# Altium PCB pcb_spider.PcbDoc
Units mil, origin at the board's own origin, x right, y up, seen from the top; angles counter-clockwise.
Board outline 6370 x 4735 mil, 2 copper layers (Top Layer, Bottom Layer); 6 components, 21 nets, 142 pads, 8 vias.
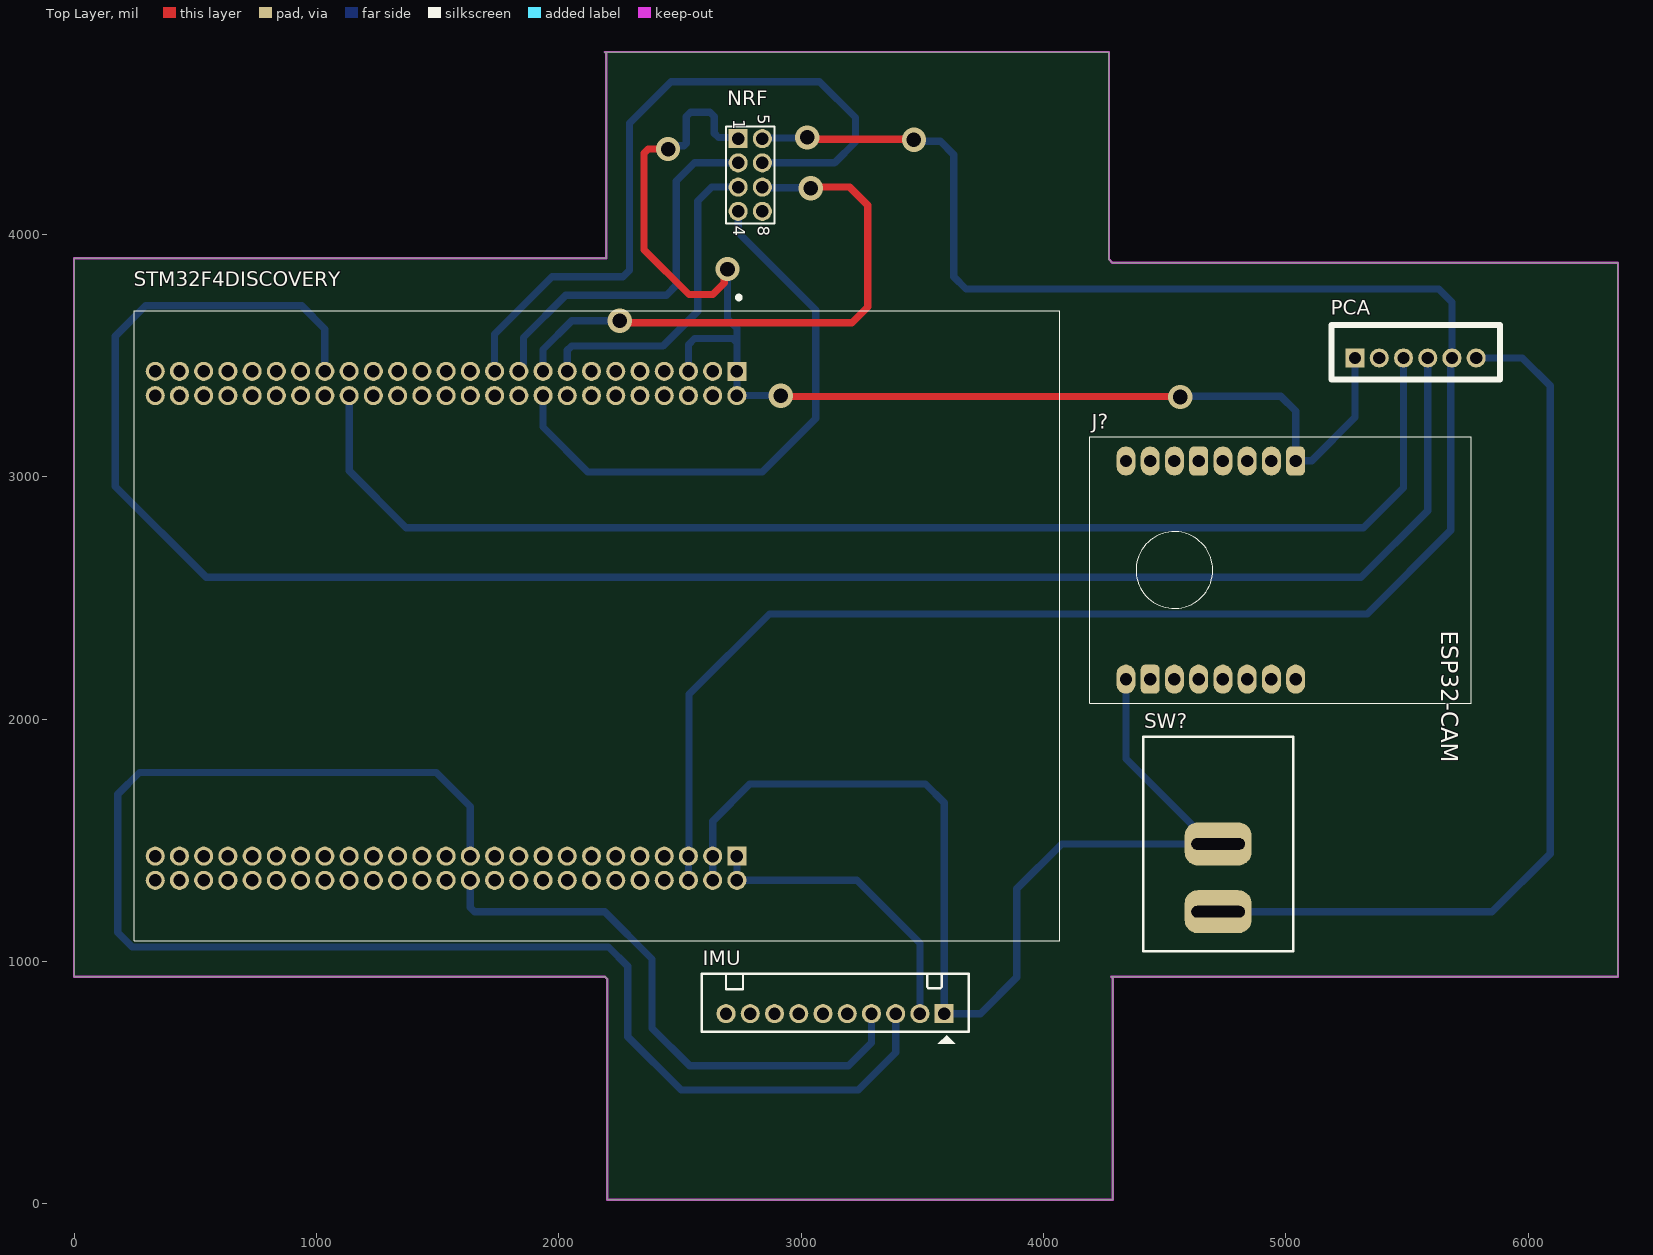
[diagram p0: Top Layer view]
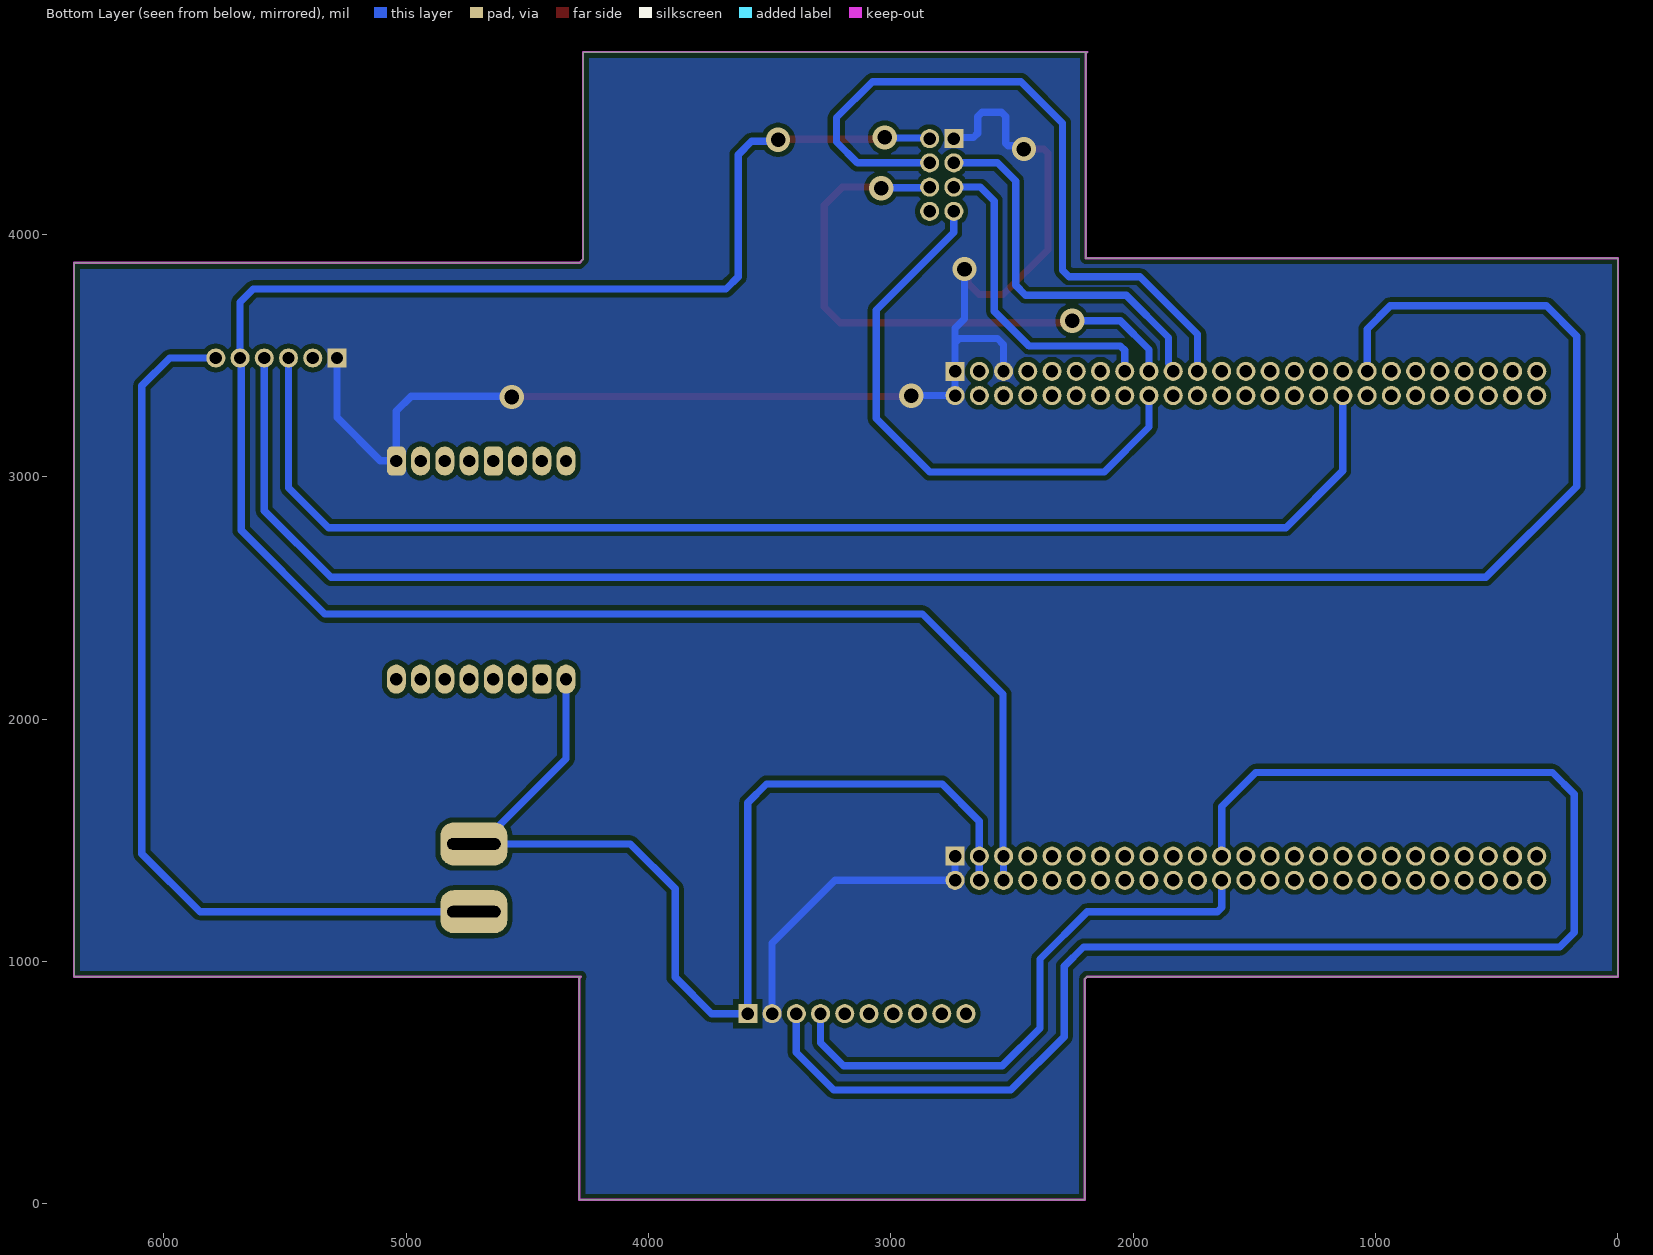
[diagram p1: Bottom Layer view, seen from below]

## Layer stack, top to bottom
Top Solder: solder mask 0.4, Solder Resist, Dk 3.5
Top Layer: signal copper 1.4
Dielectric 1: dielectric 12.6, FR-4, Dk 4.8
Bottom Layer: signal copper 1.4
Bottom Solder: solder mask 0.4, Solder Resist, Dk 3.5

## Board outline
6370,937.4 4280,937.4 4285,932.4 4285,17.4 2200,17.4 2200,927.4 2190,937.4 0,937.4 0,3902.4 2195,3902.4 2195,4747.4 2190,4752.4 4270,4752.4 4270,3897.4 4285,3882.4 6370,3882.4

## Design rules (kind name [scope] priority, off if disabled: settings)
Clearance [All] p1: gap=20 ignorepadtopadclearanceinfootprint=FALSE
PolygonConnect PolygonConnect_1 [All vs IsNamedPolygon('GND_L02_P000')] p1: connectstyle=Direct reliefconductorwidth=10 reliefentries=4 polygonreliefangle="90 Angle" airgapwidth=10
PolygonConnect [All] p2: connectstyle=Relief reliefconductorwidth=10 reliefentries=4 polygonreliefangle="90 Angle" airgapwidth=10
RoomDefinition schel [InComponentClass('schel')] p1: confinementstyle=ConfineIn formatcopy=TRUE lockcomponents=FALSE outline -1000,-247.6 1000,-247.6 1000,752.4 -1000,752.4
RoutingVias [All] p1: holewidth=28 width=50 viastyle="Through Hole" minholewidth=28 minwidth=50 maxholewidth=28 maxwidth=50
SolderMaskExpansion [All] p1: expansion=4 istentingtop=FALSE
Width [All] p1: maxlimit=50 minlimit=20 preferedwidth=30
30 further rules are at their usual default settings.

## Components (designator, comment, footprint, x,y, rotation, side; value= is the part's Value field where it differs from the comment)
IMU "" "Header 10P DC 2.54" 3590,785 r90 top
J? "ESP32-CAM" ESP32-CAM 4740,2615 r270 top
NRF "" HDR2X4_CEN 2740,4395 r270 top
PCA "" XH2.54M-6 5285,3490 r0 top
STM32F4DISCOVERY "" MODULE_STM32F4DISCOVERY 2157.05,2385 r270 top
SW? "ROCKET SWITCH-10A" SW_2ARS_TH 4721,1207.47 r180 top

## Footprints (in the part's own frame and the unit in brackets; to place one, negate y for a bottom-side part, rotate by r counter-clockwise, add the part's x,y. Pads: shape width x height; smd on the part's side, far side on the other; paste and mask are expansions set on the pad)
ESP32-CAM [mil]
  rrect50% 120x78 hole 51.18: P$1(-450,300) P$5(-450,-100) P$10(450,-300)
  oval 120x78 hole 51.18: P$2(-450,200) P$3(-450,100) P$4(-450,0) P$6(-450,-200) P$7(-450,-300) P$8(-450,-400) P$9(450,-400) P$11(450,-200) P$12(450,-100) P$13(450,0) P$14(450,100) P$15(450,200) P$16(450,300)
  silkscreen extent -550,-550 550,1025
HDR2X4_CEN [mm] "Connector; Header; 4x2 Position"
  rect 2x2 hole 1.3: 1(0,0)
  round 2 hole 1.3: 2(2.54,0) 3(5.08,0) 4(7.62,0) 5(0,2.54) 6(2.54,2.54) 7(5.08,2.54) 8(7.62,2.54)
  silkscreen extent -1.27,-1.27 8.89,3.81
"Header 10P DC 2.54" [mm]
  rect 2x2 hole 1.3: 1(0,0)
  round 2 hole 1.3: 2(0,2.54) 3(0,5.08) 4(0,7.62) 5(0,10.16) 6(0,12.7) 7(0,15.24) 8(0,17.78) 9(0,20.32) 10(0,22.86)
  silkscreen extent -3.16,-2.57 4.19,25.43
MODULE_STM32F4DISCOVERY [mm]
  rect 2x2 hole 1.3: P1_1(-26.67,14.68) P2_1(24.13,14.68)
  round 2 hole 1.3: P1_2(-24.13,14.68) P1_3(-26.67,12.14) P1_4(-24.13,12.14) P1_5(-26.67,9.6) P1_6(-24.13,9.6) P1_7(-26.67,7.06) P1_8(-24.13,7.06) P1_9(-26.67,4.52) P1_10(-24.13,4.52) P1_11(-26.67,1.98) P1_12(-24.13,1.98) P1_13(-26.67,-0.56) P1_14(-24.13,-0.56) P1_15(-26.67,-3.1) P1_16(-24.13,-3.1) P1_17(-26.67,-5.64) P1_18(-24.13,-5.64) P1_19(-26.67,-8.18) P1_20(-24.13,-8.18) P1_21(-26.67,-10.72) P1_22(-24.13,-10.72) P1_23(-26.67,-13.26) P1_24(-24.13,-13.26) P1_25(-26.67,-15.8) P1_26(-24.13,-15.8) P1_27(-26.67,-18.34) P1_28(-24.13,-18.34) P1_29(-26.67,-20.88) P1_30(-24.13,-20.88) P1_31(-26.67,-23.42) P1_32(-24.13,-23.42) P1_33(-26.67,-25.96) P1_34(-24.13,-25.96) P1_35(-26.67,-28.5) P1_36(-24.13,-28.5) P1_37(-26.67,-31.04) P1_38(-24.13,-31.04) P1_39(-26.67,-33.58) P1_40(-24.13,-33.58) P1_41(-26.67,-36.12) P1_42(-24.13,-36.12) P1_43(-26.67,-38.66) P1_44(-24.13,-38.66) P1_45(-26.67,-41.2) P1_46(-24.13,-41.2) P1_47(-26.67,-43.74) P1_48(-24.13,-43.74) P1_49(-26.67,-46.28) P1_50(-24.13,-46.28) P2_2(26.67,14.68) P2_3(24.13,12.14) P2_4(26.67,12.14) P2_5(24.13,9.6) P2_6(26.67,9.6) P2_7(24.13,7.06) P2_8(26.67,7.06) P2_9(24.13,4.52) P2_10(26.67,4.52) P2_11(24.13,1.98) P2_12(26.67,1.98) P2_13(24.13,-0.56) P2_14(26.67,-0.56) P2_15(24.13,-3.1) P2_16(26.67,-3.1) P2_17(24.13,-5.64) P2_18(26.67,-5.64) P2_19(24.13,-8.18) P2_20(26.67,-8.18) P2_21(24.13,-10.72) P2_22(26.67,-10.72) P2_23(24.13,-13.26) P2_24(26.67,-13.26) P2_25(24.13,-15.8) P2_26(26.67,-15.8) P2_27(24.13,-18.34) P2_28(26.67,-18.34) P2_29(24.13,-20.88) P2_30(26.67,-20.88) P2_31(24.13,-23.42) P2_32(26.67,-23.42) P2_33(24.13,-25.96) P2_34(26.67,-25.96) P2_35(24.13,-28.5) P2_36(26.67,-28.5) P2_37(24.13,-31.04) P2_38(26.67,-31.04) P2_39(24.13,-33.58) P2_40(26.67,-33.58) P2_41(24.13,-36.12) P2_42(26.67,-36.12) P2_43(24.13,-38.66) P2_44(26.67,-38.66) P2_45(24.13,-41.2) P2_46(26.67,-41.2) P2_47(24.13,-43.74) P2_48(26.67,-43.74) P2_49(24.13,-46.28) P2_50(26.67,-46.28)
  silkscreen extent -34.61,-48.5 33,48.5
SW_2ARS_TH [mm] "CASE: TH"
  rrect60% 7x4.5 hole 1.2 slot 5.6 at 0 deg mask+0.076: 1(0.025,0.051) 2(0.025,-7.049)
  silkscreen extent -7.87,-18.29 7.87,4.19, body extent -7.47,-17.9 7.53,3.8, height 17.81
XH2.54M-6 [mm]
  rect 2x2 hole 1.3: 1(0,0)
  round 2 hole 1.3: 2(2.54,0) 3(5.08,0) 4(7.62,0) 5(10.16,0) 6(12.7,0)
  silkscreen extent -2.48,-2.26 15.18,3.46, body extent -2.48,-2.26 15.18,3.48, height 6.91

## Part data
IMU: library part "Header 10P 2.54 Duc Cong", "Cắm", Chung_Loai=Cắm, Don_Vi=Con, Ma_Hang=MH007094, Ten_Linh_Kien="Header 10P XH2.54-10P Đực Cong"
J?: "ESP32 ESP32 Transceiver; 802.11 a/b/g/n (Wi-Fi, WiFi, WLAN), BluetoothÂ® Smart 4.x Low Energy (BLE) Evaluation Board", Package=None, Check_prices=https://www.snapeda.com/parts/ESP32-CAM/AI-Thinker/view-part/?ref=eda, MF=AI-Thinker, MP=ESP32-CAM, SnapEDA_Link=https://www.snapeda.com/parts/ESP32-CAM/AI-Thinker/view-part/?ref=snap
NRF: library part "Header 4X2A", "Header, 4-Pin, Dual row", LatestRevisionDate=17-Jul-2002, LatestRevisionNote="Re-released for DXP Platform.", Publisher="Altium Limited"
PCA: library part "Header 6P 2.54 Duc Thang", "Cắm", Chung_Loai=Cắm, Don_Vi=Con, Ma_Hang=MH001972, Ten_Linh_Kien="Header 6P XH2.54-6P Đực Thẳng"
STM32F4DISCOVERY: library part STM32F4DISCOVERY, "Development kit: ARM ST; pin strips, pin header; No.of", Package=None, Availability=Unavailable, MP=STM32F4DISCOVERY, Price=None
SW?: library part SW1_10A-SRB23A2BBBNN-TH, "Rocker Switch SPDT 10A (AC) 125V Panel Mount, Snap-In", Alternate Part Number-1=NA, Case/Package=TH, Manufacturer="ITT C&K", Manufacturer Part Number=SRB23A2BBBNN, Supplier Part Number-1=SRB23A2BBBNN, Supplier-1="SP ROAD"

## Via types
v1: diameter 100, hole 60, Top Layer to Bottom Layer, 8 vias

## Nets (pads, with @x,y where several pads share a name; then routed paths per layer and width w, separated by ;. In a path a pad name is that pad's centre, name@x,y a point inside that pad or via, vN(x,y) a via of type N, cw(c..) or ccw(c..) an arc to the next point about the centre after c; other vN are vias at no path point)
3V: NRF.5 PCA.5 STM32F4DISCOVERY.P2_5 STM32F4DISCOVERY.P2_6 | length 8558.3
  Top Layer w30: v1(3025,4400) 3032.5,4392.5 3462.5,4392.5 v1(3465,4390)
  Bottom Layer w30: STM32F4DISCOVERY.P2_6 STM32F4DISCOVERY.P2_5 2537.5,1437.5 2537.5,2102.5 2869,2434 5335,2434 5680,2779 5680,3485 PCA.5 5685,3720 5630,3775 3680,3775 3630,3825 3630,4329 3575,4384 3471,4384 v1(3465,4390) ; NRF.5 2842.5,4397.5 3022.5,4397.5 v1(3025,4400)
5V: IMU.1 J?.P$9 STM32F4DISCOVERY.P2_3 STM32F4DISCOVERY.P2_4 SW?.2 | length 4623.6
  Bottom Layer w30: STM32F4DISCOVERY.P2_4 STM32F4DISCOVERY.P2_3 2635,1579 2788,1732 3513,1732 3590,1655 IMU.1 3740,785 3890,935 3890,1300 4075,1485 SW?.2@4691.43,1485 ; J?.P$9 4340,1836.43 SW?.2@4691.43,1485 ; SW?.2 SW?.2@4691.43,1485
ADO: IMU.7
CE: NRF.2 STM32F4DISCOVERY.P1_19 | length 1583.4
  Bottom Layer w30: STM32F4DISCOVERY.P1_19 1835,3448.19 1854.66,3467.85 1854.66,3574.66 2029,3749 2444,3749 2485,3790 2485,4220 2560,4295 NRF.2
CSN: NRF.6 STM32F4DISCOVERY.P1_21 | length 3011.1
  Bottom Layer w30: STM32F4DISCOVERY.P1_21 1735,3588 1972,3825 2265,3825 2292,3852 2292,4459 2463,4630 3076,4630 3224,4482 3224,4381 3138,4295 NRF.6
ECL: IMU.6
EDA: IMU.5
FSYNC: IMU.10
GND: IMU.2 J?.P$1 NRF.1 PCA.1 STM32F4DISCOVERY.P1_1 STM32F4DISCOVERY.P1_2 STM32F4DISCOVERY.P1_5 STM32F4DISCOVERY.P2_1 STM32F4DISCOVERY.P2_2 | length 6696.1
  Top Layer w30: v1(2451,4352) 2369.57,4352 2352,4334.43 2352,3937 2537,3752 2635,3752 2682.61,3799.61 2682.61,3843.61 v1(2696,3857) ; v1(2916,3334) 2918.5,3331.5 4561.5,3331.5 v1(4564,3329)
  Bottom Layer w30: v1(2451,4352) 2464.39,4365.39 2515.39,4365.39 2525.61,4375.61 2525.61,4486.43 2543.18,4504 2623.93,4504 2641.5,4486.43 2641.5,4417.07 2659.07,4399.5 2735.5,4399.5 NRF.1 ; STM32F4DISCOVERY.P1_5 2535,3545 2560,3570 2717.43,3570 2735,3552.43 ; v1(2696,3857) 2696,3652.29 2735,3613.29 2735,3552.43 ; STM32F4DISCOVERY.P2_1 STM32F4DISCOVERY.P2_2 3230,1335 3490,1075 IMU.2 ; v1@2906,3334 2905,3335 STM32F4DISCOVERY.P1_2 STM32F4DISCOVERY.P1_1 2735,3552.43 ; v1@4576,3332 4979,3332 5040,3271 J?.P$1 5041.43,3066.43 5106.43,3066.43 5285,3245 PCA.1
INT: IMU.8
IRQ: NRF.8
MISO: NRF.4 STM32F4DISCOVERY.P1_18 | length 2410.3
  Bottom Layer w30: STM32F4DISCOVERY.P1_18 1935,3205 2120,3020 2840,3020 3060,3240 3060,3688 2740,4008 NRF.4
MOSI: NRF.7 STM32F4DISCOVERY.P1_17 | length 2400.2
  Top Layer w30: v1(2252,3644) 2261,3635 3210,3635 3275,3700 3275,4120 3200,4195 3045,4195 v1(3040,4190)
  Bottom Layer w30: STM32F4DISCOVERY.P1_17 1935,3525 2054,3644 v1(2252,3644) ; NRF.7 2842.5,4192.5 3037.5,4192.5 v1(3040,4190)
NCS: IMU.9
OE: PCA.2
SCK: NRF.3 STM32F4DISCOVERY.P1_15 | length 1337
  Bottom Layer w30: STM32F4DISCOVERY.P1_15 2035,3521.43 2052.57,3539 2429,3539 2573,3683 2573,4138 2630,4195 NRF.3
SCL_IMU: IMU.3 STM32F4DISCOVERY.P2_23 | length 6198.6
  Bottom Layer w30: STM32F4DISCOVERY.P2_23 1635,1640 1495,1780 270,1780 180,1690 180,1120 240,1060 2205,1060 2285,980 2285,690 2505,470 3235,470 3390,625 IMU.3
SCL_PCA: PCA.3 STM32F4DISCOVERY.P1_34 | length 5360.7
  Bottom Layer w30: STM32F4DISCOVERY.P1_34 1135,3025 1370,2790 5320,2790 5485,2955 PCA.3
SDA_IMU: IMU.4 STM32F4DISCOVERY.P2_24 | length 2364
  Bottom Layer w30: STM32F4DISCOVERY.P2_24 1635,1222.57 1652.57,1205 2190,1205 2385,1010 2385,725 2540,570 3195,570 3290,665 IMU.4
SDA_PCA: PCA.4 STM32F4DISCOVERY.P1_35 | length 8065.4
  Bottom Layer w30: STM32F4DISCOVERY.P1_35 1035,3610 940,3705 295,3705 170,3580 170,2960 545,2585 5310,2585 5585,2860 PCA.4
V+: PCA.6 SW?.1 | length 3758.6
  Bottom Layer w30: SW?.1@4724.76,1210.24 SW?.1 5850.47,1205.47 6090,1445 6090,3375 5975,3490 PCA.6
pads on no net: J?.P$2 J?.P$3 J?.P$4 J?.P$5 J?.P$6 J?.P$7 J?.P$8 J?.P$10 J?.P$11 J?.P$12 J?.P$13 J?.P$14 J?.P$15 J?.P$16 STM32F4DISCOVERY.P1_3 STM32F4DISCOVERY.P1_4 STM32F4DISCOVERY.P1_6 STM32F4DISCOVERY.P1_7 STM32F4DISCOVERY.P1_8 STM32F4DISCOVERY.P1_9 STM32F4DISCOVERY.P1_10 STM32F4DISCOVERY.P1_11 STM32F4DISCOVERY.P1_12 STM32F4DISCOVERY.P1_13 STM32F4DISCOVERY.P1_14 STM32F4DISCOVERY.P1_16 STM32F4DISCOVERY.P1_20 STM32F4DISCOVERY.P1_22 STM32F4DISCOVERY.P1_23 STM32F4DISCOVERY.P1_24 STM32F4DISCOVERY.P1_25 STM32F4DISCOVERY.P1_26 STM32F4DISCOVERY.P1_27 STM32F4DISCOVERY.P1_28 STM32F4DISCOVERY.P1_29 STM32F4DISCOVERY.P1_30 STM32F4DISCOVERY.P1_31 STM32F4DISCOVERY.P1_32 STM32F4DISCOVERY.P1_33 STM32F4DISCOVERY.P1_36 STM32F4DISCOVERY.P1_37 STM32F4DISCOVERY.P1_38 STM32F4DISCOVERY.P1_39 STM32F4DISCOVERY.P1_40 STM32F4DISCOVERY.P1_41 STM32F4DISCOVERY.P1_42 STM32F4DISCOVERY.P1_43 STM32F4DISCOVERY.P1_44 STM32F4DISCOVERY.P1_45 STM32F4DISCOVERY.P1_46 STM32F4DISCOVERY.P1_47 STM32F4DISCOVERY.P1_48 STM32F4DISCOVERY.P1_49 STM32F4DISCOVERY.P1_50 STM32F4DISCOVERY.P2_7 STM32F4DISCOVERY.P2_8 STM32F4DISCOVERY.P2_9 STM32F4DISCOVERY.P2_10 STM32F4DISCOVERY.P2_11 STM32F4DISCOVERY.P2_12 STM32F4DISCOVERY.P2_13 STM32F4DISCOVERY.P2_14 STM32F4DISCOVERY.P2_15 STM32F4DISCOVERY.P2_16 STM32F4DISCOVERY.P2_17 STM32F4DISCOVERY.P2_18 STM32F4DISCOVERY.P2_19 STM32F4DISCOVERY.P2_20 STM32F4DISCOVERY.P2_21 STM32F4DISCOVERY.P2_22 STM32F4DISCOVERY.P2_25 STM32F4DISCOVERY.P2_26 STM32F4DISCOVERY.P2_27 STM32F4DISCOVERY.P2_28 STM32F4DISCOVERY.P2_29 STM32F4DISCOVERY.P2_30 STM32F4DISCOVERY.P2_31 STM32F4DISCOVERY.P2_32 STM32F4DISCOVERY.P2_33 STM32F4DISCOVERY.P2_34 STM32F4DISCOVERY.P2_35 STM32F4DISCOVERY.P2_36 STM32F4DISCOVERY.P2_37 STM32F4DISCOVERY.P2_38 STM32F4DISCOVERY.P2_39 STM32F4DISCOVERY.P2_40 STM32F4DISCOVERY.P2_41 STM32F4DISCOVERY.P2_42 STM32F4DISCOVERY.P2_43 STM32F4DISCOVERY.P2_44 STM32F4DISCOVERY.P2_45 STM32F4DISCOVERY.P2_46 STM32F4DISCOVERY.P2_47 STM32F4DISCOVERY.P2_48 STM32F4DISCOVERY.P2_49 STM32F4DISCOVERY.P2_50

## Polygon pours and split planes (outlines as drawn)
GND on Bottom Layer "GND_L02_P000" (solid, pour order 0): -1,9.72 -1,3916.28 2194,3916.28 2189,3921.28 2189,4765.28 4269,4765.28 4269,3910.28 4284,3895.28 6369,3895.28 6369,949.28 4280,949.28 4284,945.28 4284,30.28 2198,30.28 2199,31.28 2199,940.28 2188.28,951 -1.25,951

## Keep-outs
Keep-Out Layer:
  the board outline again, w10

## Other copper
Bottom Layer:
  pour cut-out: 4302.33,40.97 4302.33,920.07 6370,920.07 6370,57.11
  pour cut-out: 0,-3.55 0,920.07 2182.67,920.07 2182.53,919.93 2182.53,17.23
  pour cut-out: 0,-3.55 0,920.07 2182.67,920.07 2182.67,17.37 2182.53,17.23

## Text inside footprints (layer, text, board x,y; h text height)
NRF: Top Overlay "5" at 2820,4495 h50 r270; Top Overlay "1" at 2720,4475 h50 r270; Top Overlay "4" at 2720,4035 h50 r270; Top Overlay "8" at 2820,4035 h50 r270